# Altium PCB PCB_TUD-EnergyHarvestingConsole_1.pcbdoc (part 2 of 2)
Units mm, origin at the board's own origin, x right, y up, seen from the top; angles counter-clockwise.
Board outline 313.3 x 236.5 mm, 2 copper layers (Top Layer, Bottom Layer); 229 components, 132 nets, 925 pads, 303 vias.
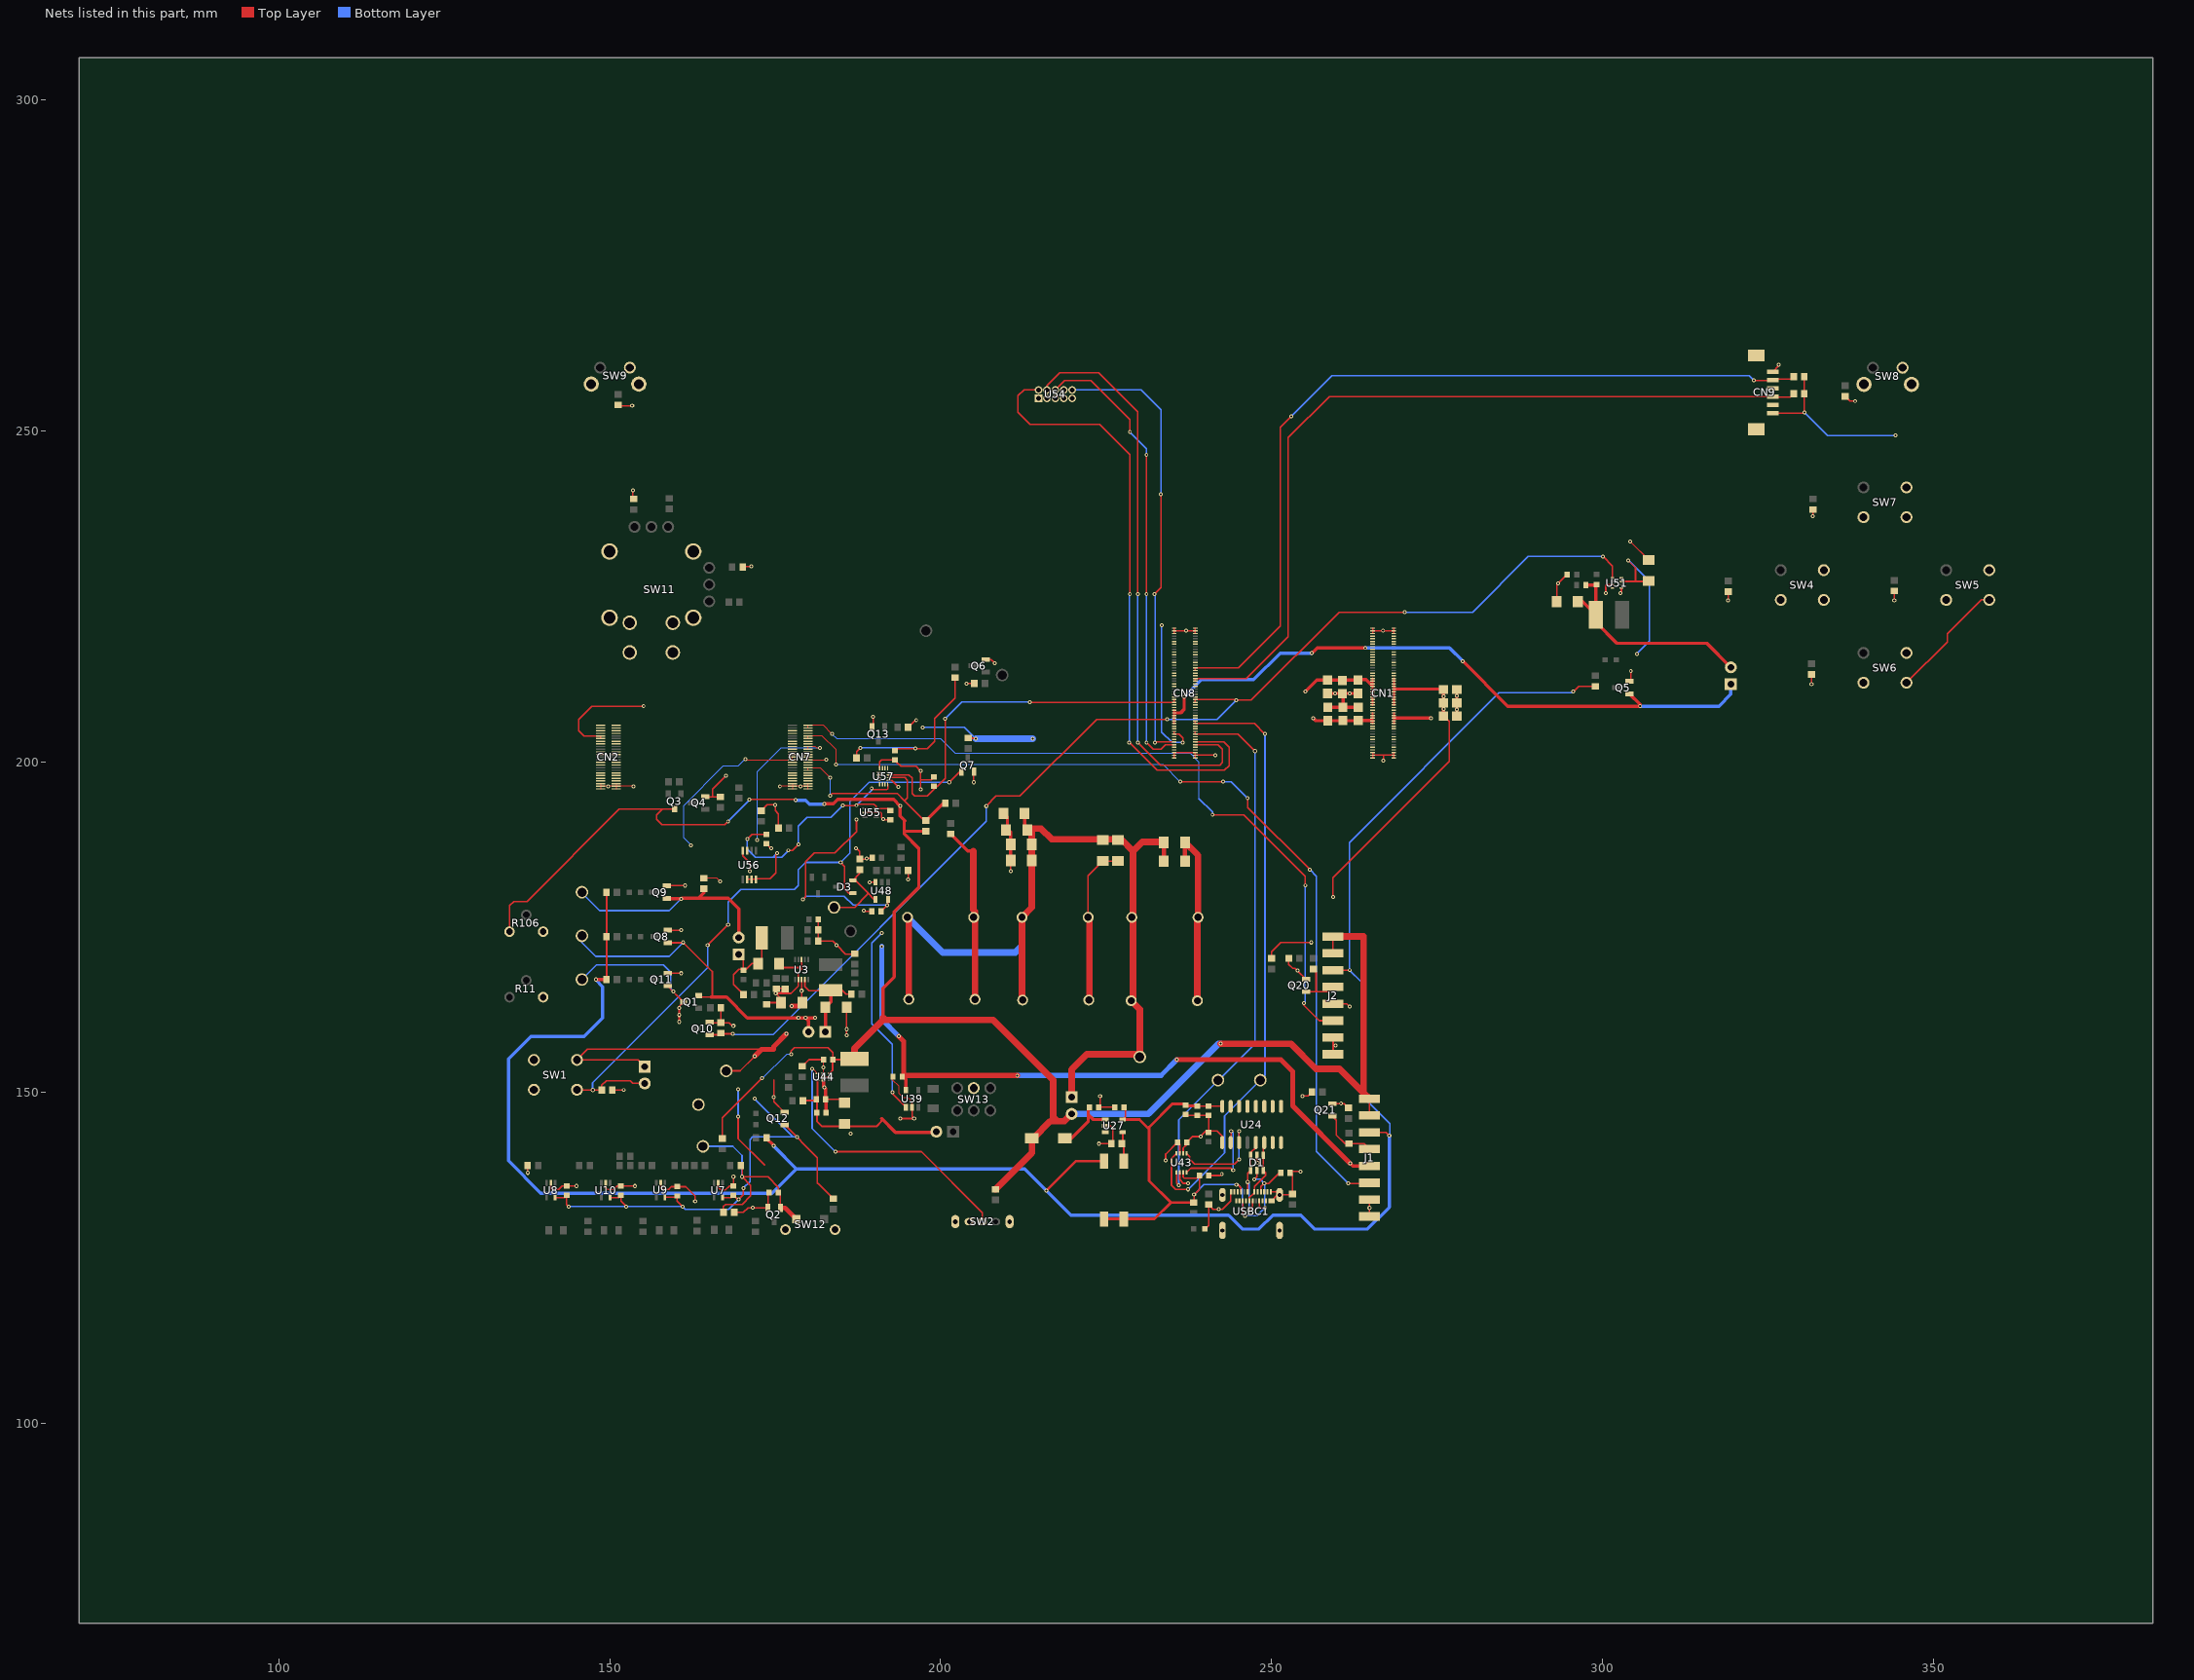
[diagram p2: the nets of this part, all layers, seen from the top]

## Via types
v1: diameter 0.579, hole 0.295, Top Layer to Bottom Layer, 184 vias
v2: diameter 0.61, hole 0.305, Top Layer to Bottom Layer, 93 vias
v3: diameter 0.58, hole 0.295, Top Layer to Bottom Layer, 26 vias

## Nets (pads, with @x,y where several pads share a name; then routed paths per layer and width w, separated by ;. In a path a pad name is that pad's centre, name@x,y a point inside that pad or via, vN(x,y) a via of type N, cw(c..) or ccw(c..) an arc to the next point about the centre after c; other vN are vias at no path point) (continued)
APO_STOR_V: C61.2 CN8.22 CN8.23 U57.3 | length 57.4
  Top Layer w0.2: U57.3@192.168,197.999 195.2,197.999 195.675,197.525 195.675,197.269 195.7,197.244 195.7,195.2 196.1,194.8 198,194.8 200.7,197.5 v1(200.7,206.5) ; v1(213.5,209) 213.517,208.982 CN8.22@235.284,208.982 CN8.23@235.284,209.382
  Bottom Layer w0.2: v1(200.7,206.5) 203.2,209 v1(213.5,209)
APO_STOR_V_PRE: CN7.33 CN7.35 R20.1 R30.1 U57.2 | length 33.6
  Top Layer w0.127: CN7.35@179.99,198.7 CN7.33@179.99,199.1 181.8,199.1 v1(183.3,197.6)
  Top Layer w0.2: U57.2@192.168,197.6 194.6,197.6 195,197.2 195,194.576 194.549,194.125
  Top Layer w0.25: v3(183.3,194.9) 183.6,195.2 193.474,195.2 194.549,194.125 197.574,191.1 R20.1@197.8,191.1
  Top Layer w0.5: R20.1@197.8,191.1 200.4,193.7 R30.1@200.7,193.7
  Bottom Layer w0.127: v3(183.3,194.9) v1(183.3,197.6)
APO_SYS_3V3_AUX_EN: CN8.78 CN8.79 Q10.1 R59.1 U51.1 | length 177
  Top Layer w0.2: v2(206.9,193.3) 208.4,194.8 212,194.8 223.6,206.4 v1(234.2,206.4) ; CN8.79@238.484,208.982 CN8.78@238.484,209.382 244.617,209.382 v1(244.7,209.3) 246.9,209.3 260.2,222.6 v1(270.1,222.6) ; v1(300.1,231) 301.524,229.575 U51.1@301.524,227.75
  Top Layer w0.25: Q10.1@165.1,158.75 166.503,158.75 166.8,159.047 166.947,158.9 v2(168.6,158.9)
  Bottom Layer w0.2: v1(234.2,206.4) 241.8,206.4 v1(244.7,209.3) ; v1(270.1,222.6) 280.4,222.6 288.8,231 v1(300.1,231)
  Bottom Layer w0.25: v2(168.6,158.9) 168.7,158.801 174.701,158.801 206.9,191 v2(206.9,193.3)
AUTO_ON_APO_OUT: D3.2 R10.1 U32.1 U48.4 | length 12.8
  Top Layer w0.2: U32.1@183.9,178 187,178 188.952,179.952 188.952,180.247 ; R10.1@187.8,183.7 187.8,183.115 D3.2@186.735,182.05 187.15,182.05 188.952,180.247 ; U48.4@190.15,179.2 190,179.2 188.952,180.247
BTT_LIGHT_EN: C36.2 Q2.1 R19.1 R65.2 SW12.1 U35.1 | length 33.1
  Top Layer w0.2: R19.1@167.2,131.9 167.2,132.8 167.5,133.1 170,133.1 171.3,134.4 171.3,136 v2(170,137.3) ; R65.2@169.8,139 170,138.8 v2(170,137.3) ; Q2.1@175.8,132.6 175.8,134.6 C36.2@175.5,134.9 175.5,135.7 173.9,137.3 v2(170,137.3)
  Top Layer w0.7: Q2.1@175.8,132.6 176.5,132.6 SW12.1@178.2,130.9
  Bottom Layer w0.25: U35.1@164.1,141.9 168.6,141.9 170,140.5 v2(170,137.3)
CRANK2_CURR_SENSE: CN7.25 CN7.27 | length 3.1
  Top Layer w0.127: CN7.25@179.99,200.699 CN7.27@179.99,200.3 v1(182.7,200.3)
CRANK_CURR_SENSE: CN7.9 CN7.11 J1.6 | length 139.7
  Top Layer w0.127: CN7.11@179.99,203.5 CN7.9@179.99,203.9 182.1,203.9 184.2,201.8 v1(184.2,199.6)
  Top Layer w0.19: v1(236.21,197) v3(242.7,197) ; v3(246.4,194.5) 246.4,193.1 v3(255.8,183.7) ; v3(261.6,136.3) 264.71,136.3 J1.6@264.8,136.39
  Bottom Layer w0.127: v1(184.2,199.6) 233.61,199.6 v1(236.21,197)
  Bottom Layer w0.19: v3(242.7,197) 243.9,197 v3(246.4,194.5) ; v3(255.8,183.7) 256.8,182.7 256.8,141.1 v3(261.6,136.3)
CRANK_DETECT: J1.4 Q21.1 R95.1 | length 9
  Top Layer w0.254: Q21.1@259.2,146.45 259.8,145.85 259.8,143.6 261.1,142.3 R95.1@261.7,142.3 263.97,142.3 J1.4@264.8,141.47
D+: D1.3 D1.4 U24.5 USBC1.A6 USBC1.B6 | length 13.9
  Top Layer w0.2: v2(246.4,136.5) 246.4,137.801 D1.4@246.85,138.251 246.85,140.249 D1.3@246.95,140.349 ; v2@246.6,132.2 247.15,132.75 USBC1.B6@247.15,133.66 ; D1.3@246.85,140.549 246.851,140.95 247.636,141.735 U24.5@247.635,142.464
  Top Layer w0.25: USBC1.A6@246.4,135.01 v2(246.4,136.5)
  Bottom Layer w0.2: v2(246.4,136.5) 246.6,136.3 v2@246.6,132.2
  other v2: 246.6,132.2
D-: D1.1 D1.6 U24.6 USBC1.A7 USBC1.B7 | length 9.9
  Top Layer w0.2: USBC1.B7@246.65,133.66 246.65,134.15 247.399,134.9 USBC1.A7@247.4,135.01 ; USBC1.A7@247.4,135.01 247.4,135.8 249.1,137.5 249.1,137.901 D1.6@248.75,138.251 248.75,140.249 D1.1@248.85,140.349 ; D1.1@248.75,140.549 248.75,142.309 U24.6@248.905,142.464
DEBUG_5V: J1.3 J2.3 R13.2 R21.2 R44.2 R82.2 R83.2 SW14.2 | length 324.1
  Top Layer w0.2: v1(295.6,210.6) 296.4,211.4 R44.2@298.9,211.4
  Top Layer w0.25: R82.2@149.547,167.1 R21.2@149.547,180.3 ; J2.3@259.3,168.51 259.31,168.5 v1(261.8,168.5) ; J1.3@264.8,144.01 267.29,144.01 v2(267.8,143.5)
  Top Layer w0.4: v1(216,135.2) 220.475,139.675 SW14.2@224.7,139.675
  Top Layer w0.5: v2(147.9,167.1) R82.2@149.547,167.1 ; R83.2@173.653,143.2 173.653,143.147 v2(174.8,142)
  Bottom Layer w0.2: v1(261.8,168.5) 261.8,187.8 284.4,210.4 295.4,210.4 v1(295.6,210.6)
  Bottom Layer w0.25: v1(261.8,168.5) 263.6,166.7 263.6,149.6 267.9,145.3 267.9,143.6 v2(267.8,143.5)
  Bottom Layer w0.5: v2(147.9,167.1) 148.9,166 148.901,161.3 146.099,158.499 138.099,158.499 134.7,155.1 134.7,139.7 139.599,134.8 174.499,134.8 178.2,138.499 ; v2(174.8,142) 174.8,141.9 178.2,138.5 212.702,138.5 216.001,135.201 219.702,131.5 243.5,131.5 245.599,129.4 248.1,129.4 250.2,131.5 254.401,131.5 256.5,129.4 264.499,129.4 267.801,132.7 v2(267.8,143.5)
ESP_3V3: C1.2 CN7.26 CN7.28 J1.5 J2.5 U39.5 | length 192.7
  Top Layer w0.127: v1(170.5,200.4) 170.6,200.3 CN7.28@177.61,200.3 CN7.26@177.61,200.699
  Top Layer w0.25: J2.5@259.3,163.43 261.37,163.43 v1(261.8,163)
  Top Layer w0.5: C1.2@194.4,152.4 194.75,152.05 U39.5@194.75,150.4 ; v3(261.9,139.3) 262.27,138.93 J1.5@264.8,138.93
  Top Layer w0.75: v3(193.7,158.5) 194.4,157.8 194.4,152.4 194.6,152.6 v3(211.6,152.6) ; v3(235.7,155) 251.4,155 253.2,153.2 253.2,148 v3(261.9,139.3)
  V+ w0.5: v1(162.3,187.4) 169,187.4 173.8,182.6 177.7,182.6 180.6,179.7 184.3,179.7 191.1,172.9 v3(191.1,172.1) ; v1(261.8,163) 261.8,139.4 v3(261.9,139.3)
  Bottom Layer w0.127: v1(162.3,187.4) 161.1,188.6 161.1,193.3 167.1,199.3 169.4,199.3 v1(170.5,200.4)
  Bottom Layer w0.75: v3(191.1,172.1) 191.1,161.1 v3(193.7,158.5) ; v3(211.6,152.6) 233.3,152.6 v3(235.7,155)
GND: C1.1 C2.1 C3.1 C4.1 C5.1 C7.1 C8.2 C10.1 C11.2 C12.1 C13.2 C14.2 C15.1 C16.1 C17.1 C18.2 C21.1 C22.2 C23.2 C24.1 C25.2 C26.2 C27.2 C28.2 C29.2 C30.2 C31.2 C33.2 C34.1 C36.1 C38.2 C39.2 C40.2 C41.2 C42.1 C43.1 C44.1 C45.1 C46.1 C54.1 C55.1 C57.1 C58.2 C61.1 C62.1 C63.1 C64.1 C65.2 CN1.1 CN1.2 CN1.3 CN1.48 CN1.49 CN1.50 CN1.51 CN1.52 CN1.53 CN1.98 CN1.99 CN1.100 CN2.45 CN2.46 CN2.47 CN2.48 CN2.49 CN2.50 CN7.45 CN7.46 CN7.47 CN7.48 CN7.49 CN7.50 CN8.1 CN8.2 CN8.3 CN8.48 CN8.49 CN8.50 CN8.51 CN8.52 CN8.53 CN8.98 CN8.99 CN8.100 CN9.1 D1.2 J1.7 J1.8 J2.7 J2.8 LED4.2 Q2.2 Q4.2 Q5.2 Q6.2 Q7.2 Q8.2 Q9.2 Q10.2 Q11.2 Q12.2 Q13.2 Q20.2 Q21.2 R1.2 R2.2 R3.1 R4.2 R5.2 R9.2 R10.2 R14.1 R15.2 R16.1 R18.2 R19.2 R23.1 R26.1 R29.1 R31.1 R32.2 R33.2 R34.1 R36.2 R42.2 R48.1 R49.1 R50.1 R51.1 R52.1 R53.1 R56.2 R58.2 R59.2 R70.1 R93.2 R96.2 R101.1 R107.1 SW2.1 U1.2 U2.1 U3.2 U3.8 U7.2 U8.2 U9.2 U10.2 U12.2 U13.2 U15.2 U16.2 U24.1 U27.2 U39.2 U43.2 U44.2 U44.7 U46.2 U48.3 U51.3 U51.5 U54.3 U54.5 U55.2 U56.4 U57.8 USBC1.0 USBC1.A1 USBC1.A12 USBC1.B1 | length 387.4
  Top Layer w0.127: CN2.50@148.61,195.9 CN2.48@148.61,196.3 ; CN2.46@148.61,196.7 CN2.48@148.61,196.3 ; CN2.49@150.99,195.9 CN2.47@150.99,196.3 ; CN2.45@150.99,196.7 CN2.47@150.99,196.3 ; v1(153.6,196.3) CN2.47@150.99,196.3 ; R18.2@164.2,182.4 166.2,182.4 v2(166.7,181.9) ; v1(175.7,196.3) CN7.48@177.61,196.3 ; CN7.50@177.61,195.9 CN7.48@177.61,196.3 ; CN7.46@177.61,196.7 CN7.48@177.61,196.3 ; CN7.49@179.99,195.9 CN7.47@179.99,196.3 ; CN7.45@179.99,196.7 CN7.47@179.99,196.3 ; U44.7@182.3,152.4 v1(182.3,153.839) C34.1@182.3,155 ; C1.1@192.8,152.4 192.8,151.9 193.7,151 193.7,149.9 194.4,149.2 195.1,149.2 195.7,148.6 U39.2@195.7,147.8 ; CN2.48@148.61,196.3 v1(149.763,196.3) CN2.47@150.99,196.3 ; CN7.48@177.61,196.3 v1(178.805,196.3) CN7.47@179.99,196.3
  Top Layer w0.19: R2.2@175.2,165.747 176.453,165.747 175.706,165 ; U39.2@195.7,147.8 195.7,146.4 v2(196,146.1) ; LED4.2@239.951,129.4 240.5,129.949 R15.2@240.5,133.1 241.2,132.4 v3(241.995,132.4) 242.54,132.4 243.8,133.66
  Top Layer w0.2: v2(137.6,137.9) 137.6,138.953 R70.1@137.647,139 ; C39.2@143.5,135.9 v2(144.999,135.9) ; R3.1@150.4,150.4 v1(152.1,150.4) ; R52.1@151.3,253.9 151.4,253.8 v2(153.4,253.8) ; C40.2@151.7,135.9 v2(153.8,135.9) ; Q9.2@158.6,181.25 158.65,181.3 v2(161.4,181.3) ; Q11.2@158.8,168.05 v2(160.8,168.05) ; Q8.2@158.8,174.55 v2(160.8,174.55) ; Q4.2@164.471,194.721 165.546,194.721 ; R42.2@166.7,194.7 166.678,194.721 165.546,194.721 ; R59.2@166.8,160.554 168.047,160.554 168.499,160.099 v2(168.7,160.1) ; v1(167.6,197.9) 165.546,195.846 165.546,194.721 ; R19.2@168.8,131.9 170.2,131.9 170.9,132.6 v1(171.623,132.6) Q2.2@173.9,132.6 173.9,134.7 C36.1@174.1,134.9 ; U56.4@170.122,186.575 170.122,185.778 171.2,184.7 v1(171.2,183.5) ; R5.2@172.9,192.6 173.8,193.5 v1(175,193.5) 175,192.6 175.5,192.1 R34.1@175.5,190 ; C8.2@173.7,187.6 v1(174.4,186.9) ; R32.2@181.454,172.9 183.699,172.9 v2(184.292,172.307) 185.647,170.952 R23.1@187.001,170.952 ; C27.2@182.6,149 184.992,149 C17.1@185.5,148.492 ; C4.1@185.792,162.9 185.8,162.892 v2(185.8,159.6) v2(185.8,158.7) ; v1(187.2,186.9) 187.34,186.9 187.8,186.44 R10.2@187.8,185.3 188.7,185.3 v1(188.8,185.4) 189.6,185.4 C10.1@189.7,185.5 ; v1(188.4,177.5) 188.5,177.4 C3.1@189.6,177.4 ; U55.2@188.557,192.3 191,192.3 191.1,192.2 191.1,191.6 191.5,191.2 C7.1@192.4,191.2 ; v1@189.3,181.8 U48.3@190.15,181.8 ; Q13.2@189.65,205.2 189.8,205.35 v1(189.8,206.8) ; U57.8@190.8,199.032 190.8,200 191.1,200.3 C29.2@193.1,200.3 ; C29.2@193.3,200 194,199.3 196.3,199.3 v1(196.975,198.625) 196.975,197.269 196.975,195.825 v1(197,195.8) ; v1(195.1,182.2) R36.2@195.1,183.6 ; R9.2@195.1,205.2 196.2,206.3 v1(196.3,206.3) ; v1(203.9,211.8) R4.2@205.1,211.8 ; Q6.2@206.8,215.45 207.65,215.45 v1(208.2,214.9) ; v1(210.6,183.5) C65.2@210.6,184.725 ; U12.2@222.3,176.5 222.3,182.8 C64.1@224.5,185 224.507,185.007 C63.1@226.8,185.007 ; v2(223.9,142.3) R16.1@225.8,142.3 226,142.5 226,144.6 225.6,145 U27.2@224.899,145 ; v2(224.1,149.5) 224.1,147.8 C31.2@226.1,147.8 ; CN8.1@235.284,200.582 CN8.2@235.284,200.982 CN8.3@235.284,201.382 CN8.98@238.484,201.382 CN8.99@238.484,200.982 ; CN8.48@235.284,219.382 CN8.49@235.284,219.782 ; CN8.50@235.284,220.182 CN8.49@235.284,219.782 ; C26.2@237,146.5 237.1,146.6 C23.2@238.8,146.6 C22.2@240.5,146.6 C25.2@240.5,144.2 ; CN8.100@238.484,200.582 CN8.99@238.484,200.982 ; CN8.53@238.484,219.382 CN8.52@238.484,219.782 ; CN8.51@238.484,220.182 CN8.52@238.484,219.782 ; v2(239.284,143.384) 240.1,144.2 C25.2@240.5,144.2 ; v1(241.488,200.982) CN8.99@238.484,200.982 ; U24.1@242.555,142.464 242.555,143.445 241.8,144.2 C25.2@240.5,144.2 ; 243.8,133.66 243.8,134.91 USBC1.A1@243.9,135.01 ; D1.2@247.8,140.549 247.8,139.5 v2(247.9,139.4) ; USBC1.A12@249.9,135.01 250.76,135.01 USBC1.0@251.22,134.55 ; USBC1.B1@250,133.66 250.89,134.55 USBC1.0@251.22,134.55 ; v2(254.357,138.1) 253.2,138.1 253,137.9 253.2,137.7 R14.1@253.2,134.7 253.05,134.55 USBC1.0@251.22,134.55 ; J1.8@264.8,131.31 v2(264.8,132.596) J1.7@264.8,133.85 ; CN1.1@265.284,200.582 CN1.2@265.284,200.982 ; CN1.3@265.284,201.382 CN1.2@265.284,200.982 ; CN1.48@265.284,219.382 CN1.49@265.284,219.782 ; CN1.50@265.284,220.182 CN1.49@265.284,219.782 ; v1(266.9,200.2) 266.9,200.948 266.934,200.982 ; CN1.100@268.484,200.582 CN1.99@268.484,200.982 ; CN1.98@268.484,201.382 CN1.99@268.484,200.982 ; CN1.53@268.484,219.382 CN1.52@268.484,219.782 ; CN1.51@268.484,220.182 CN1.52@268.484,219.782 ; C12.1@293.1,224.2 293.1,226.753 R107.1@294.646,228.3 ; Q5.2@304.1,212.15 304.3,212.35 v1(304.3,213.7) ; CN9.1@325.75,258.925 326.599,259.775 v1(326.599,260) ; R53.1@336.699,255.2 337.399,254.5 v1(338.199,254.5) ; CN8.49@235.284,219.782 v1(237.118,219.782) CN8.52@238.484,219.782 ; CN1.2@265.284,200.982 266.934,200.982 ; CN1.49@265.284,219.782 v1(266.854,219.782) CN1.52@268.484,219.782 ; 266.934,200.982 CN1.99@268.484,200.982
  Top Layer w0.25: U8.2@141.1,136.351 141.1,135.6 141.3,135.4 142.3,135.4 142.8,135.9 C39.2@143.5,135.9 ; U10.2@149.4,136.351 149.401,135.7 149.701,135.4 150.6,135.4 151.1,135.9 C40.2@151.7,135.9 ; v2(153.5,241) 153.5,239.753 R58.2@153.6,239.653 ; U9.2@157.7,136.4 157.7,135.7 158,135.4 158.9,135.4 159.3,135.8 C41.2@160.2,135.8 ; C41.2@160.199,135.799 161.499,135.799 162.906,134.394 v2(162.906,133.59) ; Q10.2@165.1,160.65 165.197,160.553 166.8,160.553 R29.1@166.8,162.8 ; U7.2@166.399,136.352 166.399,135.7 166.8,135.301 167.499,135.301 168.101,135.9 C38.2@168.7,135.9 ; C38.2@168.7,135.9 v2(168.7,137.3) ; R56.2@170.053,229.4 170.153,229.5 v2(171.4,229.5) ; R26.1@173.8,163.347 174.053,163.6 C2.1@175.907,163.6 175.907,164.192 v2(175.1,165) 175.706,165 177.4,165 178.5,166.1 U3.2@178.5,167.1 178.5,168.092 179.009,168.601 ; 174.8,151.953 v2(174.8,149.346) 174.8,148.65 Q12.2@176.4,147.05 ; C5.1@175.591,169.499 176.193,168.9 179.008,168.9 ; U3.8@179,170.1 179.008,168.9 ; 179.01,168.9 179.01,168.6 179.008,168.9 ; R101.1@179.1,154 180.1,155 C34.1@182.3,155 ; R32.2@181.454,172.9 181.5,172.947 R33.2@181.5,174.6 C33.2@181.5,176.2 ; U44.7@182.3,152.4 U44.2@183.217,152.4 ; v2(193.893,146.1) v2(196,146.1) ; 196.975,197.269 198.569,197.269 C61.1@199,197.7 ; v2(205,196.9) 205,198.45 Q7.2@205.05,198.5 ; R93.2@252.6,170.3 252.6,169.396 253.196,168.8 253.55,168.8 v1(253.917,168.432) Q20.2@255.2,167.15 ; J2.8@259.3,155.81 259.3,157.09 ; J2.7@259.3,158.35 259.3,157.09 ; v1(259.7,157.1) 259.69,157.09 259.3,157.09 ; v1(300.5,225.5) 300.5,226.6 300.65,226.75 U51.3@301.524,226.75 ; v1(302.7,225.5) 302.875,225.675 U51.5@302.875,226.25 ; v1(304.2,233.3) 304.2,233.285 C11.2@307,230.485 ; v2(319,224.4) R49.1@319,225.747 ; v2(331.599,211.7) R51.1@331.599,213.247 ; v2(331.799,237.1) R48.1@331.799,238.147 ; v2(344.099,224.4) R50.1@344.099,225.847
  Top Layer w0.254: U43.2@236.65,140.85 236.65,141.632 237.2,142.182 C28.2@237.2,142.5 238.084,143.384 v2(239.284,143.384) ; C58.2@240.499,137.5 242.3,137.5 v1(242.5,137.7) ; Q21.2@259.2,148.35 v1(260.524,148.35) 260.95,148.35 R96.2@261.6,147.7
  Top Layer w0.5: U44.7@182.3,152.4 182.3,150.9 182.6,150.6 C27.2@182.6,149 182.7,148.9 C24.1@182.7,147 ; R31.1@201.5,189.1 204.1,186.5 204.93,186.5 ; C14.2@209.507,192.2 210.1,191.607 210.1,189.9 210.6,189.4 C62.1@210.6,187.5 C65.2@210.6,185.1 C65.2@210.6,184.725 ; C55.1@258.476,210.317 v1(259.597,210.317) v1(261.802,210.317) C42.1@263.055,210.317 ; C45.1@258.5,208.2 263.076,208.2 C44.1@263.094,208.217 ; C43.1@260.7,210.3 260.794,210.205 C46.1@260.794,208.217 ; C54.1@278,206.9 v1(278,207.897) C57.1@278,208.9 v1(278,209.94) C15.1@278,210.9
  Top Layer w0.7: C18.2@236.919,184.981 C16.1@236.919,187.818
  Top Layer w1: 204.93,186.5 204.93,177.67 205.2,177.4 U1.2@205.2,164.1 ; U12.2@222.3,176.5 222.5,176.3 222.5,164.1 U13.2@222.4,164 ; C16.1@236.919,187.818 236.951,187.818 238.9,185.87 U15.2@238.9,176.5 238.8,176.4 U16.2@238.8,163.9
  other v1: 182.407,150.793 189.3,181.8 191.354,191.346 293.303,226.957
LOG_UART_RX: CN2.10 CN2.12 CN8.10 CN8.11 | length 129.5
  Top Layer w0.2: CN2.12@148.61,203.5 CN2.10@148.61,203.9 146.1,203.9 145.3,204.7 145.3,206.4 147.3,208.4 v1(155.1,208.4) ; CN8.11@235.284,204.582 CN8.10@235.284,204.182 236.017,204.182 236.6,203.6 v1(236.6,202.9)
  V+ w0.2: v1(155.1,208.4) 160.9,208.4 169,216.5 171.7,216.5 184.5,229.3 219.8,229.3 228.5,220.6 v1(233.4,220.6)
  Bottom Layer w0.2: v1(233.4,220.6) 233.4,204.5 235,202.9 v1(236.6,202.9)
LUX.SCL: CN8.66 CN8.67 CN9.2 R40.2 | length 128
  Top Layer w0.2: CN8.67@238.484,213.782 CN8.66@238.484,214.182 244.982,214.182 251.3,220.5 251.3,250.5 v1(253,252.2) ; v1(322.9,257.6) 325.725,257.6 CN9.2@325.925,257.8
  Top Layer w0.25: CN9.2@325.125,257.8 325.925,257.8 328.499,257.8 R40.2@328.899,258.2
  Bottom Layer w0.2: v1(253,252.2) 259.1,258.3 322.2,258.3 v1(322.9,257.6)
LUX.SDA: CN8.70 CN8.71 CN9.4 R39.2 | length 126.5
  Top Layer w0.2: CN8.71@238.484,212.182 CN8.70@238.484,212.582 246.182,212.582 252.5,218.9 252.5,248.953 258.746,255.2 325.5,255.2 CN9.4@325.5,255.3
  Top Layer w0.25: CN9.4@325.5,255.3 325.625,255.3 325.825,255.1 328.399,255.1 R39.2@328.899,255.6
MAIN_STOR: C34.2 D5.2 H5.2 J1.1 J1.2 J2.1 J2.2 L6.1 Q3.3 R20.2 R45.1 R81.1 R106.1 U44.3 | length 302.7
  Top Layer w0.19: v1(177.4,155.8) 177.4,156.3 177.9,156.8 183,156.8 183.7,156.1 C34.2@183.7,155
  Top Layer w0.2: R106.1@134.86,174.33 134.86,178.26 135.5,178.9 137.5,178.9 151.45,192.85 157.95,192.85 ; Q3.3@159.8,192.85 157.95,192.85 ; R81.1@167,143.053 167,146.2 v1(172.984,152.184) ; v1(167.9,191) 167.4,190.5 157.9,190.5 157.1,191.3 157.1,192 157.95,192.85 ; v1(171.1,194.3) 178,194.3 v1(178.1,194.2) ; J2.2@259.3,171.05 J2.1@259.3,173.59 ; J1.2@264.8,146.55 J1.1@264.8,149.09
  Top Layer w0.3: U44.3@183.2,152.9 183.7,153.4 C34.2@183.7,155 L6.1@186.9,155
  Top Layer w0.5: v3(182.4,193.6) 182.453,193.653 183.8,193.653 184.446,194.3 192.9,194.3 v1(193.9,193.3) 193.9,191.8 194.6,191.1 194.5,191 194.5,189.545 ; 191.3,161 191.3,161.356 191.3,165.8 193,167.5 193,177.3 196.7,181 196.7,186.9 194.5,189.1 194.5,189.545 ; R20.2@197.8,189.5 194.545,189.5 194.5,189.545
  Top Layer w1: L6.1@187,155.1 187,156.7 191.3,161 ; 191.3,161.356 191.656,161 207.9,161 217,151.9 217,146.327 217.627,145.7 ; R45.1@208.3,135.4 213.796,140.896 D5.2@213.796,143.1 214,143.1 216.6,145.7 217.627,145.7 ; H5.2@219.8,146.8 218.7,145.7 217.627,145.7 ; v1(242.3,157.4) 252.9,157.4 256.7,153.6 260.29,153.6 263.9,149.99 ; J2.1@259.3,173.59 263.9,173.59 263.9,149.99 ; J1.1@264.8,149.09 263.9,149.99
  V+ w0.2: v1(193.9,193.3) 194.3,193.7 194.3,201.4
  Bottom Layer w0.127: v1(172.984,152.184) 173.084,152.184 176.7,155.8 v1(177.4,155.8)
  Bottom Layer w0.2: v1(167.9,191) 171.1,194.2 v1(171.1,194.3)
  Bottom Layer w0.5: v1(178.1,194.2) 179.6,194.2 180.2,193.6 v3(182.4,193.6)
  Bottom Layer w1: H5.2@219.8,146.8 231.4,146.8 242,157.4 v1(242.3,157.4)
MAIN_STOR_PRE: C13.1 C14.1 C16.2 C18.1 C62.2 C63.2 C64.2 C65.1 H5.1 U1.1 U12.1 U13.1 U15.1 U16.1 U34.1 U46.1 | length 137.9
  Top Layer w0.5: C14.1@212.692,192.2 212.692,190.492 C13.1@213.285,189.9
  Top Layer w0.7: C18.1@233.734,184.981 C16.2@233.734,187.304
  Top Layer w1: U46.1@195,176.5 195.2,176.3 U1.1@195.2,164.1 ; U13.1@212.4,164 212.3,164.1 U12.1@212.3,176.5 213.785,177.985 C65.1@213.785,185.1 C62.2@213.785,187.5 213.785,189.9 215.199,189.9 216.799,188.3 227.27,188.3 229.07,186.5 ; H5.1@219.8,149.34 219.8,153.5 222.1,155.8 229.7,155.8 U34.1@230.1,155.4 230.1,162.6 U16.1@228.8,163.9 229.07,164.17 229.07,186.5 ; C16.2@233.734,187.304 C16.2@233.734,187.565 ; C16.2@233.734,187.818 C16.2@233.734,187.565 ; 229.07,186.5 230.47,187.9 233.4,187.9 C16.2@233.734,187.565
  Bottom Layer w1: U46.1@195,176.5 200.3,171.2 211.3,171.2 212.3,172.2 U12.1@212.3,176.4
PC_UART_RX: CN8.86 CN8.87 U5.1 U43.4 | length 93.1
  Top Layer w0.2: CN8.86@238.484,206.182 CN8.87@238.484,205.782 247.417,205.782 v2(249,204.2)
  Top Layer w0.254: U43.4@235.65,140.85 234.9,140.1 234.9,136 235.5,135.4 v2(237.4,135.4)
  Bottom Layer w0.25: v2(237.4,135.4) 242.9,140.9 242.9,146.5 U5.1@248.3,151.9 249,152.6 v2@249,204.201
PC_UART_RX_5V: U24.3 U43.1 | length 15.2
  Top Layer w0.2: U43.1@237.15,140.85 237.65,140.35 237.65,139.95 238.35,139.25 244.45,139.25 v2(245.1,139.9) ; U24.3@245.095,142.464 v2(245.1,144.2)
  Bottom Layer w0.2: v2(245.1,139.9) v2(245.1,144.2)
PC_UART_TX: CN8.90 CN8.91 U14.1 U43.5 | length 82.9
  Top Layer w0.2: CN8.90@238.484,204.582 CN8.91@238.484,204.182 244.917,204.182 v2(247.5,201.6)
  Top Layer w0.254: U43.5@235.65,137.95 235.65,136.35 v2(236,136)
  Bottom Layer w0.25: v2(236,136) 236,145.9 247.5,157.4 v2(247.5,201.6)
PC_UART_TX_5V: U24.2 U43.8 | length 15.2
  Top Layer w0.2: U24.2@243.825,142.464 243.9,142.539 v2(243.9,144.2)
  Top Layer w0.254: U43.8@237.15,137.95 237.8,138.6 243.9,138.6 v2(244.2,138.3)
  Bottom Layer w0.2: v2@243.9,144.2 244.2,143.9 v2(244.2,138.3)
POWER_BUTT: D3.1 H3.2 Q7.1 R3.2 SW1.4 | length 103.5
  Top Layer w0.2: v2(147.447,150.4) R3.2@148.8,150.4 148.8,151.1 149.5,151.8 153.1,151.8 153.5,151.4 H3.2@155.3,151.4 ; v2(184.9,184.8) 185.5,184.2 185.5,180.8 186.15,180.15 D3.1@186.735,180.15
  Top Layer w0.25: SW1.4@145.05,150.45 145.1,150.4 v2(147.447,150.4) ; v2(164.8,172.3) v2(167.9,175.4) ; v2(201.3,196.9) 202.899,198.499 Q7.1@203.15,198.499
  Bottom Layer w0.25: v2@147.448,150.399 147.4,150.447 147.4,151.501 164.799,168.9 v2@164.799,172.298 ; v2(167.9,175.4) 167.9,178.8 169.8,180.7 177.899,180.7 178.499,181.3 178.499,183.701 179.6,184.801 v2@184.901,184.801 ; v2(184.9,184.8) 186.3,186.2 186.3,194 189.2,196.9 v2(201.3,196.9)
POWER_EN: SW2.2 U44.4 | length 42.4
  Top Layer w0.127: v2(180.6,153.6) 180.682,153.6 U44.4@181.382,152.9
  Top Layer w0.25: v2(184.1,141.1) 197.1,141.1 206.322,131.877 SW2.2@206.322,130.513
  Bottom Layer w0.25: v2(180.6,153.6) 180.6,144.6 v2(184.1,141.1)
SOLAR_CURR_SENSE: CN7.1 CN7.3 J2.6 | length 113.3
  Top Layer w0.127: CN7.3@179.99,205.1 CN7.1@179.99,205.5 182.3,205.5 v1(183.6,204.2)
  Top Layer w0.19: v3(241.1,192) 245.8,192 255.1,182.7 v3(255.1,181.3)
  Top Layer w0.25: v3(254.9,163.5) 254.9,163.2 257.21,160.89 J2.6@259.3,160.89
  Bottom Layer w0.127: v1(183.6,204.2) 184.3,203.5 200,203.5 202.2,201.3 237.7,201.3 239,200 239,194.5
  Bottom Layer w0.19: 239,194.5 241.1,192.4 v3(241.1,192) ; v3(254.9,163.5) 255.1,163.7 v3(255.1,181.3)
SOLAR_DETECT: J2.4 Q20.1 R17.1 | length 8
  Top Layer w0.25: Q20.1@255.2,165.25 256.739,165.25 ; R17.1@256.3,168.7 256.739,168.261 256.739,165.25 ; J2.4@259.3,165.97 258.58,165.25 256.739,165.25
SWD.CLK: CN8.95 U54.4 | length 88.4
  Top Layer w0.2: U54.4@216.07,256.17 216.07,256.87 218,258.8 223.9,258.8 229.8,252.9 v1(229.8,225.3) ; v1(229.8,202.9) 233.2,199.5 242.2,199.5 242.6,199.9 242.6,201.9 241.917,202.582 CN8.95@238.484,202.582
  Bottom Layer w0.2: v1(229.8,202.9) v1(229.8,225.3)
SWD.IO: CN8.94 U54.2 | length 94.4
  Top Layer w0.2: U54.2@214.8,256.17 214.77,256.2 212.6,256.2 211.7,255.3 211.7,252.8 213.5,251 224,251 228.6,246.4 v1(228.6,225.3) ; v1(228.5,202.9) 232.7,198.7 242.9,198.7 243.6,199.4 243.6,202.2 242.817,202.982 CN8.94@238.484,202.982
  Bottom Layer w0.2: v1(228.5,202.9) 228.5,225.2 v1(228.6,225.3)
SWD.RST: CN8.7 U54.10 | length 68.3
  Top Layer w0.2: v1(232.3,225.3) 233.3,226.3 v1(233.3,240.4) ; v1(232.4,202.9) 232.482,202.982 CN8.7@235.284,202.982
  Bottom Layer w0.2: U54.10@219.88,256.17 219.91,256.2 230.3,256.2 233.3,253.2 v1(233.3,240.4) ; v1(232.3,225.3) 232.4,225.2 v1(232.4,202.9)
SWD.SWO: CN8.6 U54.6 | length 69
  Top Layer w0.2: U54.6@217.34,256.17 218.77,257.6 222.7,257.6 228.6,251.7 v1(228.6,249.8) ; v1(231.1,202.9) 232.1,201.9 233.3,201.9 233.982,202.582 CN8.6@235.284,202.582 ; v1(231.1,225.3) v1(231.1,246.4)
  Bottom Layer w0.2: v1(228.6,249.8) 231.1,247.3 v1(231.1,246.4) ; v1(231.1,202.9) v1(231.1,225.3)
SYS_0V8_REF:  | length 13.1
  Top Layer w0.25: v2(169.4,146.4) 169.401,143.05 173.399,139.05
  Bottom Layer w0.25: v2(169.4,146.4) v2(169.4,150.5)
SYS_1V2: CN8.14 CN8.15 CN8.16 CN8.17 CN8.18 CN8.19 H6.1 Q5.1 | length 99.7
  Top Layer w0.3: CN8.14@235.284,205.782 CN8.15@235.284,206.182 CN8.16@235.284,206.582 CN8.17@235.284,206.982 CN8.18@235.284,207.382 CN8.19@235.284,207.782
  Top Layer w0.5: CN8.18@235.284,207.382 236.282,207.382 236.8,207.9 v1(236.8,209.8) ; v1(256.1,216.4) 256.9,217.2 v1(264.2,217.2) ; v1(278.9,215.2) 285.7,208.4 v1(305.7,208.4) 305.7,208.65 Q5.1@304.1,210.25
  Bottom Layer w0.5: v1(236.8,209.8) 239.4,212.4 247.3,212.4 251.3,216.4 v1(256.1,216.4) ; v1(264.2,217.2) 276.9,217.2 v1(278.9,215.2) ; v1(305.7,208.4) 317.6,208.4 319.4,210.2 H6.1@319.4,211.73
SYS_1V2_PRE: C12.2 C60.2 H6.2 L7.2 R108.2 | length 34
  Top Layer w0.25: R108.2@299,226.7 R108.2@299.1,226.8
  Top Layer w0.5: C12.2@296.285,224.2 297,224.2 L7.2@299,222.2 ; C60.2@297.499,226.7 299,226.7 L7.2@299,222.2 ; H6.2@319.4,214.27 315.77,217.9 302.2,217.9 299,221.1 L7.2@299,222.2
SYS_1V8: C15.2 C28.1 C54.2 C57.2 CN1.70 CN1.71 CN1.72 CN1.73 CN1.74 CN1.75 CN1.76 CN1.77 CN1.78 CN1.79 CN1.80 CN9.6 H1.2 Q9.1 R18.1 R38.1 R39.1 R40.1 R92.1 R94.1 SW4.4 SW5.4 SW6.4 SW7.4 SW8.2 SW9.2 SW11.c U31.1 U43.3 U43.6 U54.1 U57.1 | length 699
  Top Layer w0.2: U57.1@192.168,197.2 192.6,197.2 v1(193.6,196.2) ; v1(259.3,179.6) 259.3,182.5 276.855,200.056 276.855,206.074 276.03,206.9 C54.2@276,206.9 ; CN9.6@325.75,252.675 330.375,252.675 v1(330.499,252.8) R39.1@330.499,255.6 ; SW6.4@345.949,211.95 352.099,218.1 352.099,219.3 357.25,224.45 SW5.4@358.449,224.45
  Top Layer w0.25: R38.1@204.199,203.553 205.246,203.553 v2@205.299,203.5 ; R92.1@250,170.3 250,171.3 251.4,172.7 v2(256,172.7) ; R39.1@330.499,255.6 R40.1@330.499,258.2
  Top Layer w0.254: v2(234.01,139.75) 234.01,140.71 C28.1@235.8,142.5 236.15,142.15 U43.3@236.15,140.85 ; U43.6@236.15,137.95 236.15,136.85 236.7,136.3 v1(237.4,136.3) ; v2(254.7,149.5) 255.5,149.5 R94.1@256.1,150.1
  Top Layer w0.3: CN1.80@268.484,208.582 CN1.79@268.484,208.982 CN1.78@268.484,209.382 CN1.77@268.484,209.782 CN1.76@268.484,210.182 CN1.75@268.484,210.582 CN1.74@268.484,210.982 CN1.73@268.484,211.382 CN1.72@268.484,211.782 CN1.71@268.484,212.182 CN1.70@268.484,212.582
  Top Layer w0.5: Q9.1@158.6,179.35 158.65,179.3 v2(160.8,179.3) 160.9,179.4 163.383,179.4 ; R18.1@164.2,180.8 164.2,180.216 163.383,179.4 ; H1.2@169.5,173.44 169.5,177.8 167.9,179.4 163.383,179.4 ; CN1.74@268.484,210.982 275.917,210.982 C15.2@276,210.9 v1(276,209.913) C57.2@276,208.9 v1(276,207.953) C54.2@276,206.9
  V+ w0.2: v1(193.6,196.2) 193.6,200.7 192.6,201.7 192.6,202.8 195,205.2 v1(197.3,205.2) ; U54.1@214.8,254.9 214.8,253.6 215.5,252.9 221.4,252.9 223.3,254.8 244.3,254.8 244.3,231.499 259.103,216.696 259.103,214.8 ; v2(256,172.7) 256,176.3 v1(259.3,179.6) ; v1(276,209.913) 285.387,219.3 326.799,219.3 329.299,221.8 330.799,221.8 SW4.4@333.449,224.45 ; v1(344.299,249.3) 343.199,248.2 343.199,238.3 344.549,236.95 SW7.4@345.949,236.95 SW4.4@333.449,224.45 ; SW5.4@358.449,224.45 358.449,223.65 356.999,222.2 335.699,222.2 SW4.4@333.449,224.45
  V+ w0.25: SW11.c@153.028,215.772 153.099,215.7 154.5,214.3 161.4,214.3 169.6,222.5 169.6,239.3 156.7,252.199 156.7,259.1 156.2,259.6 153.1,259.6 SW9.2@153.05,259.549 ; v1(344.299,249.3) 344.3,258.462 SW8.2@345.359,259.521
  V+ w0.254: v2(234.01,139.75) 236.15,139.75 236.9,139 236.9,136.8 v1(237.4,136.3)
  V+ w0.5: v2(234.01,139.75) 243.76,149.5 v2(254.7,149.5)
  V+ w1: SW11.c@153.028,216.51 153.099,216.439 153.099,215.7 152,214.601 152,189.505 153.099,188.406 ; v2(160.8,179.3) 160.399,179.299 153.099,186.599 153.099,188.406 ; v2(254.7,149.5) 255.5,149.5 257,151 257,171.7 v2(256,172.7) ; v1(276,209.913) 271.113,214.8 259.103,214.8 239.263,214.8 235.763,211.3 221.7,211.3 v1(213.9,203.5) 213.7,203.5 199.606,189.406 154.099,189.406 153.099,188.406
  Bottom Layer w0.2: v1(197.3,205.2) 203.6,205.2 v2(205.3,203.5) ; v1(330.499,252.8) 333.999,249.3 v1(344.299,249.3)
  Bottom Layer w0.25: U31.1@145.8,180.3 145.8,180.2 148.5,177.5 159,177.5 v2(160.8,179.3)
  Bottom Layer w1: v2(205.3,203.5) v1(213.9,203.5)
SYS_1V8_PRE: C5.2 C6.2 H1.1 L4.2 R28.2 | length 14.9
  Top Layer w0.2: H1.1@169.5,170.9 170.2,170.2 C6.2@170.2,168.634 ; C6.2@170.2,168.5 C6.2@170.2,168.634 ; R28.2@170.246,164.8 168.7,166.346 168.7,167.8 169.534,168.634 C6.2@170.2,168.634 ; L4.2@172.972,173.4 172.972,170.064 C5.2@172.407,169.5 171.5,169.5 170.634,168.634 C6.2@170.2,168.634
SYS_3V3: C42.2 C43.2 C55.2 CN1.21 CN1.22 CN1.23 CN1.24 CN1.25 CN1.26 CN1.27 CN1.28 CN1.29 CN1.30 CN1.31 H2.2 Q1.2 Q8.1 U29.1 | length 167.2
  Top Layer w0.2: 264.884,211.815 CN1.29@264.984,211.782
  Top Layer w0.25: Q8.1@158.8,172.65 161.05,172.65 v2(161.1,172.7) 165.5,168.3 165.5,164.653 165.3,164.453 163.647,164.453 Q1.2@163.45,164.65
  Top Layer w0.3: CN1.21@265.284,208.582 CN1.22@265.284,208.982 CN1.23@265.284,209.382 CN1.24@265.284,209.782 CN1.25@265.284,210.182 CN1.26@265.284,210.582 CN1.27@265.284,210.982 CN1.28@265.284,211.382 CN1.29@265.284,211.782 ; CN1.29@265.284,211.815 CN1.30@265.284,212.182 CN1.31@265.284,212.582
  Top Layer w0.5: 165.3,164.453 167.647,164.453 170.8,161.3 v2(178.5,161.3) v2(179.6,161.3) ; H2.2@180.03,159.2 180.03,160.87 v2(179.6,161.3) ; v2(181.046,161.3) v2(179.6,161.3) ; v1(255.1,210.6) 256.817,212.317 C55.2@258.476,212.317 262.906,212.317 262.989,212.4 264.3,212.4 264.884,211.815 264.917,211.782 264.984,211.782 CN1.29@265.284,211.782
  V+ w0.5: v2(178.5,161.3) v2(179.6,161.3) v2(181.046,161.3)
  V+ w1: v2(181.046,161.3) 186.1,161.3 199.3,174.5 199.3,179.8 220,200.5 236.2,200.5 238.2,202.5 245.2,202.5 253.3,210.6 v1(255.1,210.6)
  Bottom Layer w0.25: U29.1@145.8,173.7 145.8,172.7 147.9,170.6 159,170.6 v2(161.1,172.7)
SYS_3V3_AUX: C44.2 C45.2 C46.2 CN1.14 CN1.15 CN1.16 CN1.17 CN1.18 Q1.3 Q11.1 U30.1 | length 165.2
  Top Layer w0.25: Q11.1@158.751,166.101 Q1.3@161.15,163.7 ; v2(160.5,160.7) v2(160.5,161.739) 160.5,163.05 Q1.3@161.15,163.7
  Top Layer w0.3: CN1.14@265.284,205.782 CN1.15@265.284,206.182 CN1.16@265.284,206.582 CN1.17@265.284,206.982 CN1.18@265.284,207.382
  Top Layer w0.5: v1(256.3,206.6) 256.7,206.2 C45.2@258.5,206.2 263.076,206.2 C44.2@263.094,206.217 265.249,206.217 CN1.15@265.284,206.182
  V+ w1: v2(160.5,160.7) v2(160.5,161.739) v2(160.5,162.806) 160.694,163 175.5,163 176.9,164.4 185.8,164.4 192.7,171.3 192.7,177 219.8,204.1 244.4,204.1 253,212.7 257.5,212.7 257.5,207.5 256.6,206.6 v1(256.3,206.6)
  Bottom Layer w0.25: U30.1@145.8,167.1 148,169.3 158.1,169.3 159.2,168.2 159.2,165.7 v2(159.6,165.3)
SYS_3V3_PRE: C4.2 H2.1 L2.1 R24.2 U3.4 | length 15.3
  Top Layer w0.25: U3.4@179.5,167.1 179.5,166 180.1,165.4 183.328,165.4 L2.1@183.4,165.472 185.128,165.472 185.7,164.9 R24.2@186.546,164.9
  Top Layer w0.5: H2.1@182.57,159.2 182.607,159.237 C4.2@182.607,162.9 183.4,163.692 L2.1@183.4,165.472
SYS_5V: C2.2 C3.2 C7.2 C8.1 C11.1 C29.1 C38.1 C39.1 C40.1 C41.1 CN1.83 CN1.84 CN1.85 CN1.86 CN1.87 H3.1 Q12.1 R12.2 R46.1 R60.1 SW1.2 SW13.2 U3.3 U7.5 U8.5 U9.5 U10.5 U28.1 U48.5 U51.7 U55.5 U56.6 U56.7 U56.8 U57.16 | length 503.6
  Top Layer w0.19: Q12.1@176.4,145.15 181.4,140.15 181.4,136.253
  Top Layer w0.2: U8.5@141.75,134.151 143.151,134.151 C39.1@143.5,134.5 143.5,133.1 v1(143.8,132.8) ; U10.5@150.05,134.151 151.351,134.151 C40.1@151.7,134.5 151.7,133.6 v1(152.5,132.8) ; H3.1@155.3,153.94 154.29,154.95 SW1.2@145.05,154.95 146.653,156.553 172.953,156.553 ; U9.5@158.35,134.2 160,134.2 C41.1@160.2,134.4 160.2,133.6 v1(161,132.8) ; U7.5@167.05,134.151 168.351,134.151 C38.1@168.7,134.5 169.3,133.9 v1(169.5,133.9) 170.2,134.6 v1(170.2,135.6) ; U56.6@170.782,182.225 U56.7@171.417,182.225 U56.8@172.078,182.225 172.153,182.3 174.2,182.3 175.1,183.2 175.1,186 v1(175.3,186.2) ; v1(170.8,188.3) 171.5,189 C8.1@173.7,189 ; v1(177,186.6) 177.6,186.6 v1(178.5,187.5) ; v1(179.2,179.2) 179.6,179.6 179.6,184.9 180.9,186.2 184,186.2 187.3,189.5 187.3,189.7 ; 181.4,136.253 181.546,136.253 R12.2@183.8,134 ; v1(185.2,193.4) 187.265,193.4 v1(187.3,193.434) 187.465,193.6 189.9,193.6 190.242,193.257 U55.5@190.242,192.95 192.049,192.95 C7.2@192.4,192.6 ; R60.1@187.3,200.6 187.3,201.5 v1(187.9,202.1) ; v1(189.6,196) 189.8,195.8 191.9,195.8 192,195.9 U57.16@192,196.568 ; C3.2@191,177.4 192.05,178.45 U48.5@192.05,179.2 ; C29.1@193.1,201.7 193.4,202 v1(196.2,202) 198,202 199.1,203.1 199.1,206.5 202.2,209.6 R46.1@202.2,212.7
  Top Layer w0.25: U28.1@167.6,153.3 169.7,153.3 v2(171.9,155.5) ; U3.3@179,167.1 v2(179,165.4) 179,163.692 C2.2@179.092,163.6 ; 187.3,189.7 v1(187.3,191.3) ; U51.7@302.875,227.25 305,227.25 ; v1(303.9,230.4) 305,229.3 305,227.25 ; C11.1@307,227.3 306.949,227.25 305,227.25
  Top Layer w0.3: CN1.87@268.484,205.782 CN1.86@268.484,206.182 CN1.85@268.484,206.582 CN1.84@268.484,206.982 CN1.83@268.484,207.382
  Top Layer w0.5: CN1.85@268.484,206.582 274.082,206.582 v1(274.1,206.6)
  Top Layer w0.75: v2(171.9,155.5) 172.953,156.553 174.8,156.553 174.8,157 v2(176.7,158.9) ; v2@177.5,163.1 178.592,163.1 C2.2@179.092,163.6
  V+ w0.2: v2(179,165.4) 178,166.4 178,178.8 178.8,179.6 v1(179.2,179.2) ; v1(187.3,191.3) v1(187.3,193.434) 187.3,201.5 v1(187.9,202.1)
  V+ w0.5: SW13.2@205.1,151.3 205.1,152.1 205.5,152.5 209.4,152.5 210.5,151.4 210.5,149.3
  V+ w0.7: v2@186.399,143.8 188.399,141.8 205.5,141.8 210.5,146.8 210.5,149.3 213.3,152.1 234.1,152.1 251.1,169.1 251.1,189.4 263.5,201.8 270.4,201.8 274.1,205.5 v1(274.1,206.6) 295.5,206.6 v1(305.2,216.3)
  V+ w0.75: v2(171.9,149.1) 175,146 179.6,146 181.8,143.8 v2(186.4,143.8) ; v2(171.9,149.1) v2(171.9,155.5) ; v2(176.7,158.9) 176.7,162.3 v2@177.5,163.1
  Bottom Layer w0.19: v2(171.9,149.1) 177.7,143.3
  Bottom Layer w0.2: v1(143.8,132.8) v1(152.5,132.8) v1(161,132.8) 161.389,132.41 168.01,132.41 v1(169.5,133.9) ; v1(170.2,135.6) 171.2,136.6 171.2,142.9 171.6,143.3 177.7,143.3 v2(178.3,143.3) ; v1(170.8,188.3) 170.8,186.8 172,185.6 174.7,185.6 ; v1(175.3,186.2) 174.7,185.6 ; v1(177,186.6) 176,185.6 174.7,185.6 ; v1(178.5,187.5) 178.5,190.3 179.8,191.6 183.4,191.6 v1(185.2,193.4) ; v1(179.2,179.2) 179.7,179.7 185.4,179.7 186.773,178.327 v1(191.927,178.327) ; v1(187.3,193.434) 189.6,195.734 v1(189.6,196) ; v1(187.9,202.1) 196.1,202.1 v1(196.2,202) ; v1(303.9,230.4) 304,230.4 307.1,227.3 307.1,218.2 v1(305.2,216.3)
  other v2: 177.5,163.1
SYS_5V_PRE: C17.2 C24.2 C27.1 H4.2 R8.2 U44.6 | length 27.7
  Top Layer w0.3: R8.2@179.2,148.8 C27.1@180.962,148.8 ; U44.6@181.382,151.9 181.382,149.182 C27.1@181.2,149 181.3,148.9 C24.2@181.3,147 181.3,145.7 182.1,144.9 190.3,144.9 191.07,145.67 191.07,145.761
  Top Layer w0.5: 191.07,146.1 193.17,144 H4.2@199.26,144
TOTAL_CURR_SENSE: CN7.17 CN7.19 U39.1 | length 78.5
  Top Layer w0.127: CN7.19@179.99,201.9 CN7.17@179.99,202.3 181.1,202.3 181.3,202.1 v1(181.8,202.1)
  Top Layer w0.19: v3(192.7,150.1) 192.7,149.85 U39.1@194.75,147.8
  V+ w0.19: v1(172.3,188.2) 179,188.2 191.1,176.1 v3(191.1,174.1)
  Bottom Layer w0.127: v1(172.3,188.2) 172.3,198.5 175.9,202.1 v1(181.8,202.1)
  Bottom Layer w0.19: v3(191.1,174.1) 189.6,172.6 189.6,160.4 192.7,157.3 v3(192.7,150.1)
USB_5V: C21.2 C22.1 C23.1 C26.1 C31.1 C58.1 D1.5 R22.1 SW14.1 SW15.1 U24.16 U27.5 U43.7 USBC1.A4 USBC1.A9 USBC1.B4 USBC1.B9 | length 87.4
  Top Layer w0.2: U27.5@227.5,145.95 227.9,146.35 C31.1@227.9,147.8 ; C23.1@238.8,148 C22.1@240.5,148 240.564,147.935 U24.16@242.555,147.935 ; v2(244.7,136.1) 244.9,136.1 245.4,135.6 USBC1.A4@245.4,135.01 ; USBC1.B9@245.65,133.66 245.649,131.75 v2(246,131.4) ; v2(247.4,136.9) 247.8,137.3 D1.5@247.8,138.251 ; USBC1.B4@248.15,133.66 248.15,132.85 248.4,132.6 v2(249,132.6) ; USBC1.A9@248.4,135.01 248.4,135.8 v2(248.9,136.3) 249.6,136.3 C21.2@251.2,137.9
  Top Layer w0.254: U43.7@236.65,137.95 236.65,137.25 236.8,137.1 238.7,137.1 C58.1@239.1,137.5 239.1,135.4 v2(238.3,134.6) 238.3,133.5 R22.1@238.2,133.4
  Top Layer w0.4: SW14.1@224.7,130.925 SW15.1@227.7,130.925 232.325,130.925 234.8,133.4 ; U27.5@227.501,145.949 230.049,145.949 231.499,144.501 ; C26.1@237,148.3 237.3,148 C23.1@238.8,148 ; C26.1@237.001,148.301 235,148.301 231.499,144.799 231.499,144.501 ; R22.1@238.2,133.4 234.8,133.4 ; 231.499,144.501 231.499,136.701 234.8,133.4
  Bottom Layer w0.2: v2(238.3,134.6) 239.8,136.1 v2(244.7,136.1) 244.9,136.1 245.6,135.4 245.6,131.8 v2(246,131.4) 247.8,131.4 v2(249,132.6) 249,136.2 v2(248.9,136.3) 248.3,136.9 v2(247.4,136.9)
USB_5V_LIMITED: C30.1 D5.1 U27.1 | length 9.7
  Top Layer w0.5: D5.1@218.703,143.1 219.8,143.1 222.3,145.6 222.3,146.696 ; C30.1@222.3,147.8 222.3,146.696 ; U27.1@224.899,145.95 223.046,145.95 222.3,146.696
USB_PWR_SW: R16.2 SW15.2 U27.4 | length 4.5
  Top Layer w0.3: U27.4@227.5,144.05 227.5,142.4 R16.2@227.4,142.3 227.7,142 SW15.2@227.7,139.675
"": CN1.4 CN1.5 CN1.8 CN1.9 CN1.12 CN1.13 CN1.19 CN1.20 CN1.32 CN1.33 CN1.36 CN1.37 CN1.38 CN1.39 CN1.40 CN1.41 CN1.42 CN1.43 CN1.44 CN1.45 CN1.46 CN1.47 CN1.54 CN1.55 CN1.56 CN1.57 CN1.60 CN1.61 CN1.64 CN1.65 CN1.68 CN1.69 CN1.81 CN1.82 CN1.88 CN1.89 CN1.92 CN1.93 CN1.96 CN1.97 CN2.1 CN2.2 CN2.3 CN2.4 CN2.5 CN2.6 CN2.7 CN2.8 CN2.13 CN2.14 CN2.15 CN2.16 CN2.21 CN2.22 CN2.23 CN2.24 CN2.29 CN2.30 CN2.31 CN2.32 CN2.37 CN2.38 CN2.39 CN2.40 CN2.41 CN2.42 CN2.43 CN2.44 CN7.5 CN7.6 CN7.7 CN7.8 CN7.13 CN7.14 CN7.15 CN7.16 CN7.18 CN7.20 CN7.21 CN7.22 CN7.23 CN7.24 CN7.29 CN7.30 CN7.31 CN7.32 CN7.37 CN7.38 CN7.39 CN7.40 CN7.41 CN7.42 CN7.43 CN7.44 CN8.4 CN8.5 CN8.8 CN8.9 CN8.12 CN8.13 CN8.20 CN8.21 CN8.24 CN8.25 CN8.28 CN8.29 CN8.32 CN8.33 CN8.36 CN8.37 CN8.40 CN8.41 CN8.44 CN8.45 CN8.56 CN8.57 CN8.60 CN8.61 CN8.64 CN8.65 CN8.68 CN8.69 CN8.72 CN8.73 CN8.76 CN8.77 CN8.80 CN8.81 CN8.84 CN8.85 CN8.88 CN8.89 CN8.92 CN8.93 CN8.96 CN8.97 CN9.3 CN9.5 CN9.7 CN9.8 R11.3 R106.3 SW1.1 SW1.3 SW2.4 SW2.5 SW4.2 SW4.3 SW5.2 SW5.3 SW6.2 SW6.3 SW7.2 SW7.3 SW8.3 SW8.4 SW9.3 SW9.4 SW11.7 SW11.8 SW11.9 SW11.10 SW11.a SW11.b SW11.d SW12.3 SW12.4 U24.7 U24.8 U24.9 U24.10 U24.11 U24.12 U24.13 U24.14 U24.15 U27.3 U51.4 U51.8 U54.7 U54.8 U54.9 U56.3 U57.4 U57.5 U57.6 U57.7 U57.9 U57.10 U57.11 U57.12 U57.13 U57.14 U57.15 USBC1.1 USBC1.2 USBC1.3 USBC1.A2 USBC1.A3 USBC1.A8 USBC1.A10 USBC1.A11 USBC1.B2 USBC1.B3 USBC1.B8 USBC1.B10 USBC1.B11

## Polygon pours and split planes (outlines as drawn)
GND on GND (solid, remove dead copper, pour order 0): 86.1,277.5 86.6,278 371.599,278 376.799,272.8 376.799,96.9 376.299,97.4 76.2,97.4

## Keep-outs
GND:
  region net "": 154.8,187.3 174.5,187.3 174.5,197.6 154.8,197.6
Board Outline Layer:
  lines w0.254 net "": 129.8,131.638 133.813,127.699 269.777,127.699 271.799,129.693 271.9,151.7 266.4,151.7 266.5,185.6 284.327,185.6 288.217,189.668 288.309,204.808 359.774,204.699 363.8,208.687 363.8,242.7 350.8,262.7 142.8,262.7 129.8,242.38 129.8,131.638

## Silkscreen, mask and mechanical layers (free items; w line width, h text height)
Top Silkscreen Layer:
  circle w0.25 net "": c144.8,247.7 r3
  circle w0.25 net "": c134.8,132.7 r3
  circle w0.25 net "": c189.8,132.7 r3
  circle w0.25 net "": c213.8,147.7 r3
  circle w0.25 net "": c258.8,132.7 r3
  circle w0.25 net "": c244.8,177.7 r3
  circle w0.25 net "": c217.3,192.7 r3
  circle w0.25 net "": c236.8,247.7 r3
  circle w0.25 net "": c309.8,212.7 r3
  circle w0.25 net "": c354.799,212.7 r3
  circle w0.25 net "": c349.799,247.7 r3
  circle w0.25 net "": c288.8,247.7 r3
  circle w0.25 net "": c204.8,247.7 r3
  circle w0.25 net "": c136.8,182.7 r3
  circle w0.25 net "": c226.884,194.882 r3
  circle w0.25 net "": c276.884,194.882 r3
  circle w0.254 net "": c199.1,176.5 r5.75
  circle w0.254 net "": c216.337,176.5 r5.75
  circle w0.254 net "": c233.002,176.5 r5.75
  circle w0.254 net "": c233.002,163.9 r5.75
  circle w0.254 net "": c216.609,164 r5.75
  circle w0.254 net "": c199.393,164.1 r5.75
  circle w0.25 net "": c184.8,218.7 r3
  circle w0.25 net "": c195.8,210.7 r3
  region net "": 221.984,220.482 231.984,220.482 231.984,230.482 221.984,230.482
  lines w0.254 net "": 129.8,187.7 198.8,187.7 198.8,213.7 129.8,213.7 129.8,187.7
  lines w0.5 net "": 221.984,190.482 281.984,190.482 281.984,230.482 221.984,230.482 221.984,190.482
  text "Energy harvesting console V1.2" at 268.875,258.891 h1.44
  text "Feb 3 2023" at 281.736,255.791 h1.44
  text "A.C.M" at 285.951,253.091 h1.44
  text "LT_BTN" at 153.31,252.081 h1.44
  text "RT_BTN" at 335.309,251.981 h1.44
  text "Apollo SWD" at 211.49,251.344 h1.3
  text "JOYSTICK + BTN" at 145.784,241.591 h1.44
  text "Y_BTN" at 333.627,233.481 h1.44
  text "MCU+SCREEN MODULE" at 239.279,224.473 h1.44
  text "LATCH_3V3_EN" at 184.625,222.109 h1.2
  text "LATCH_STORE" at 200.377,222.109 h1.2
  text "X_BTN" at 320.927,220.881 h1.44
  text "B_BTN" at 346.227,220.881 h1.44
  text "1V2 OK" at 297.54,217.009 h1.2
  text "1V2_EN" at 323.808,208.788 h1.44 r90
  text "A_BTN" at 333.673,208.481 h1.44
  text "LOGGING MODULE" at 155.462,200.944 h1.3
  text "1V8 OK" at 148.61,177.481 h1.44
  text "1V8_EN" at 162.588,176.691 h1.44
  text "CH. MODULE 1" at 249.01,176.291 h1.44
  text "AUTO_ON" at 182.55,175.727 h0.96
  text "3V3_EN" at 183.388,172.033 h0.97
  text "+" at 192.6,171.169 h1.99
  text "+" at 210.398,171.145 h1.99
  text "+" at 226.098,171.145 h1.99
  text "3V3 OK" at 148.21,170.781 h1.44
  text "3V3_2 OK" at 147.475,163.881 h1.44
  text "+" at 192.198,159.345 h1.99
  text "+" at 210.298,159.345 h1.99
  text "+" at 226.098,159.345 h1.99
  text "POWER BUTTON" at 133.606,156.881 h1.44
  text "3V3_EN" at 176.988,156.191 h1.44
  text "UART_TX UART_RX" at 236.595,154.167 h1.2
  text "5V" at 162.979,152.581 h1.44
  text "CAPS_EN" at 214.025,151.791 h1.44
  text "CH. MODULE 2" at 249.41,151.391 h1.44
  text "GND" at 161.277,144.891 h1.44
  text "STORAGE INDICATOR" at 139.72,141.881 h1.44
  text "5V_EN" at 196.951,140.591 h1.44
  text "POWER SWITCH" at 198.206,136.581 h1.44
  text "USB_PWR DEBUG" at 217.972,128.309 h1.2
Mechanical Layer:
  circle w0.025 net "": c349.799,247.7 r1.5
  circle w0.025 net "": c309.8,212.7 r1.5
  circle w0.025 net "": c144.8,247.7 r1.5
  circle w0.025 net "": c204.8,247.7 r1.5
  circle w0.025 net "": c288.8,247.7 r1.5
  circle w0.025 net "": c354.799,212.7 r1.5
  circle w0.025 net "": c189.8,132.7 r1.5
  circle w0.025 net "": c134.8,132.7 r1.5
  circle w0.025 net "": c258.8,132.7 r1.5
  circle w0.025 net "": c244.8,177.7 r1.5
  circle w0.025 net "": c236.8,247.7 r1.5
  circle w0.025 net "": c213.8,147.7 r1.5
  circle w0.025 net "": c217.3,192.7 r1.5
  circle w0.025 net "": c136.8,182.7 r1.5
  circle w0.025 net "": c226.884,194.882 r1
  circle w0.025 net "": c276.884,194.882 r1
  circle w0.025 net "": c195.8,210.7 r1.5
  circle w0.025 net "": c184.8,218.7 r1.5
Mech6:
  lines w0.2 net "": 246.9,127.42 246.9,299.8 247.1,300 ; 251.7,76.2 251.8,76.3 251.8,262.7
  lines w0.5 net "": 171.6,186.3 191.6,186.3 191.6,236.3 171.6,236.3 171.6,186.3 ; 171.636,135.76 191.636,135.76 191.636,185.76 171.636,185.76 171.636,135.76 ; 172,238 222,238 222,258 172,258 172,238 ; 196.5,132.5 246.5,132.5 246.5,152.5 196.5,152.5 196.5,132.5 ; 222.5,238 272.5,238 272.5,258 222.5,258 222.5,238 ; 247.3,132.5 297.3,132.5 297.3,152.5 247.3,152.5 247.3,132.5 ; 273.1,238 323.1,238 323.1,258 273.1,258 273.1,238 ; 301.8,135.8 321.8,135.8 321.8,185.8 301.8,185.8 301.8,135.8 ; 301.8,186.3 321.8,186.3 321.8,236.3 301.8,236.3 301.8,186.3
  lines w1 net "": 192.5,153.3 300.8,153.3 300.8,240.85 192.5,240.85 192.5,153.3 ; 194.75,155.525 298.75,155.525 298.75,234.425 194.75,234.425 194.75,155.525

## Text inside footprints (layer, text, board x,y; h text height)
R11: Mech6 "1" at 134.86,163.81 h0.33 r180; Mech6 "2" at 139.305,167.534 h0.33 r180; Mech6 "3" at 140.194,163.81 h0.33 r180
R106: Mech6 "1" at 134.86,173.71 h0.33 r180; Mech6 "2" at 139.305,177.434 h0.33 r180; Mech6 "3" at 140.194,173.71 h0.33 r180
SW11: Top Silkscreen Layer "VR1" at 162.909,228.043 h0.96 r90; Top Silkscreen Layer "VR2" at 151.671,233.047 h0.96
SW14: Top Silkscreen Layer "ON" at 224.593,133.247 h0.49 r90
SW15: Top Silkscreen Layer "ON" at 227.593,133.247 h0.49 r90